# Altium PCB PCB1.PcbDoc (part 2 of 2)
Units mm, origin at the board's own origin, x right, y up, seen from the top; angles counter-clockwise.
Board outline 71.14 x 54.36 mm, 2 copper layers (Top Layer, Bottom Layer); 19 components, 50 nets, 188 pads, 100 vias.
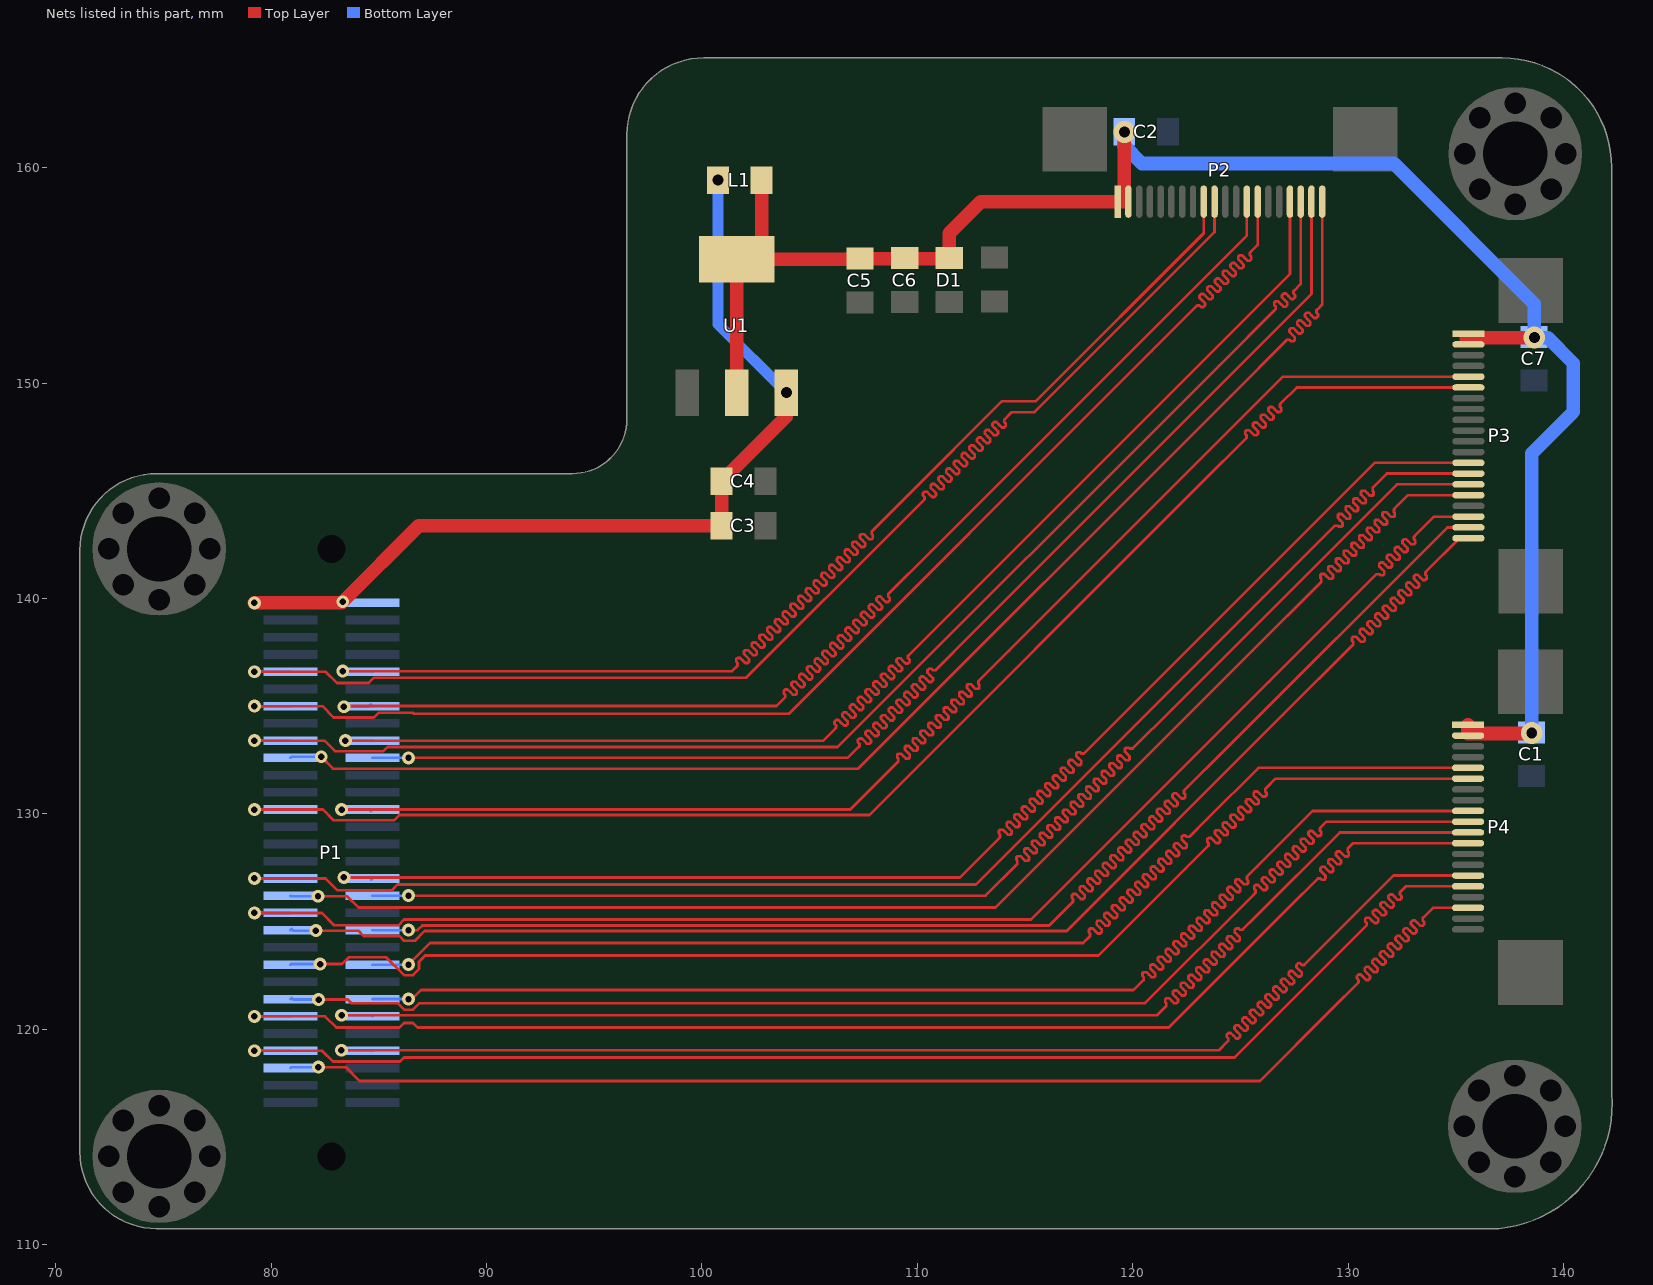
[diagram p2: the nets of this part, all layers, seen from the top]

## Via types
v1: diameter 0.6, hole 0.3, Top Layer to Bottom Layer, 56 vias
v2: diameter 1.016, hole 0.508, Top Layer to Bottom Layer, 44 vias

## Nets (pads, with @x,y where several pads share a name; then routed paths per layer and width w, separated by ;. In a path a pad name is that pad's centre, name@x,y a point inside that pad or via, vN(x,y) a via of type N, cw(c..) or ccw(c..) an arc to the next point about the centre after c; other vN are vias at no path point) (continued)
T20: P1.9 P2.9 | length 64.9
  Top Layer w0.127: v1(83.325,136.625) 101.395,136.625 101.625,136.855 101.652,136.882 101.652,137.008 101.598,137.062 101.598,137.187 101.652,137.241 101.778,137.241 101.895,137.125 102.012,137.008 102.137,137.008 102.191,137.062 102.191,137.187 102.074,137.304 101.958,137.421 101.958,137.547 102.012,137.601 102.137,137.601 102.254,137.484 102.371,137.367 102.496,137.367 102.55,137.421 102.55,137.547 102.434,137.663 102.317,137.78 102.317,137.906 102.371,137.96 102.496,137.96 102.613,137.843 102.73,137.726 102.856,137.726 102.91,137.78 102.91,137.906 102.793,138.023 102.676,138.139 102.676,138.265 102.73,138.319 102.856,138.319 102.972,138.202 103.089,138.085 103.215,138.085 103.269,138.139 103.269,138.265 103.152,138.382 103.035,138.499 103.035,138.624 103.089,138.678 103.215,138.678 103.332,138.561 103.448,138.445 103.574,138.445 103.628,138.499 103.628,138.624 103.511,138.741 103.395,138.858 103.395,138.984 103.448,139.037 103.574,139.037 103.691,138.921 103.808,138.804 103.933,138.804 103.987,138.858 103.987,138.984 103.87,139.1 103.754,139.217 103.754,139.343 103.808,139.397 103.933,139.397 104.05,139.28 104.167,139.163 104.293,139.163 104.346,139.217 104.346,139.343 104.23,139.459 104.113,139.576 104.113,139.702 104.167,139.756 104.293,139.756 104.409,139.639 104.526,139.522 104.652,139.522 104.706,139.576 104.706,139.702 104.589,139.819 104.472,139.935 104.472,140.061 104.526,140.115 104.652,140.115 104.768,139.998 104.885,139.882 105.011,139.882 105.065,139.935 105.065,140.061 104.948,140.178 104.831,140.295 104.831,140.42 104.885,140.474 105.011,140.474 105.128,140.357 105.244,140.241 105.37,140.241 105.424,140.295 105.424,140.42 105.307,140.537 105.191,140.654 105.191,140.78 105.244,140.833 105.37,140.833 105.487,140.717 105.604,140.6 105.729,140.6 105.783,140.654 105.783,140.78 105.667,140.896 105.55,141.013 105.55,141.139 105.604,141.193 105.729,141.193 105.846,141.076 105.963,140.959 106.089,140.959 106.142,141.013 106.142,141.139 106.026,141.256 105.909,141.372 105.909,141.498 105.963,141.552 106.089,141.552 106.205,141.435 106.322,141.318 106.448,141.318 106.502,141.372 106.502,141.498 106.385,141.615 106.268,141.731 106.268,141.857 106.322,141.911 106.448,141.911 106.565,141.794 106.681,141.678 106.807,141.678 106.861,141.731 106.861,141.857 106.744,141.974 106.627,142.091 106.627,142.216 106.681,142.27 106.807,142.27 106.924,142.154 107.04,142.037 107.166,142.037 107.22,142.091 107.22,142.216 107.103,142.333 106.987,142.45 106.987,142.576 107.04,142.63 107.166,142.63 107.283,142.513 107.4,142.396 107.525,142.396 107.579,142.45 107.579,142.576 107.463,142.692 107.346,142.809 107.346,142.935 107.4,142.989 107.525,142.989 107.642,142.872 107.759,142.755 107.885,142.755 107.939,142.809 107.939,142.935 107.885,142.989 107.885,143.114 109.487,144.716 113.933,149.162 115.507,149.162 123.303,156.958 P2.9@123.303,158.427
  Bottom Layer w0.127: v1(83.325,136.625) 84.675,136.625 P1.9@84.7,136.6
U12: P1.56 P4.18 | length 64.9
  Top Layer w0.127: v1(82.194,118.237) 83.461,118.237 84.1,117.598 125.904,117.598 129.235,120.929 130.485,122.179 130.485,122.287 130.413,122.359 130.413,122.467 130.485,122.538 130.593,122.538 130.719,122.413 130.844,122.287 130.952,122.287 131.024,122.359 131.024,122.467 130.898,122.592 130.772,122.718 130.772,122.826 130.844,122.898 130.952,122.898 131.078,122.772 131.203,122.646 131.311,122.646 131.383,122.718 131.383,122.826 131.257,122.952 131.132,123.077 131.132,123.185 131.203,123.257 131.311,123.257 131.437,123.131 131.563,123.005 131.67,123.005 131.742,123.077 131.742,123.185 131.617,123.311 131.491,123.436 131.491,123.544 131.563,123.616 131.67,123.616 131.796,123.49 131.922,123.365 132.03,123.365 132.101,123.436 132.101,123.544 131.976,123.67 131.85,123.796 131.85,123.903 131.922,123.975 132.03,123.975 132.155,123.85 132.281,123.724 132.389,123.724 132.461,123.796 132.461,123.903 132.335,124.029 132.209,124.155 132.209,124.263 132.281,124.334 132.389,124.334 132.515,124.209 132.64,124.083 132.748,124.083 132.82,124.155 132.82,124.263 132.694,124.388 132.568,124.514 132.568,124.622 132.64,124.694 132.748,124.694 132.874,124.568 133,124.442 133.107,124.442 133.179,124.514 133.179,124.622 133.053,124.748 132.928,124.873 132.928,124.981 133,125.053 133.107,125.053 133.233,124.927 133.359,124.801 133.466,124.801 133.538,124.873 133.538,124.981 133.466,125.053 133.466,125.161 133.502,125.197 133.942,125.636 P4.18@135.575,125.636
  Bottom Layer w0.127: P1.56@80.9,118.2 80.937,118.237 v1(82.194,118.237)
U14: P1.43 P4.5 | length 64.7
  Top Layer w0.127: v1(86.377,123) 87.38,124.003 117.704,124.003 117.996,124.295 118.023,124.322 118.023,124.448 117.969,124.501 117.969,124.627 118.023,124.681 118.148,124.681 118.265,124.564 118.382,124.448 118.508,124.448 118.561,124.501 118.561,124.627 118.445,124.744 118.328,124.861 118.328,124.986 118.382,125.04 118.508,125.04 118.624,124.924 118.741,124.807 118.867,124.807 118.921,124.861 118.921,124.986 118.804,125.103 118.687,125.22 118.687,125.346 118.741,125.399 118.867,125.399 118.984,125.283 119.1,125.166 119.226,125.166 119.28,125.22 119.28,125.346 119.163,125.462 119.046,125.579 119.046,125.705 119.1,125.759 119.226,125.759 119.343,125.642 119.459,125.525 119.585,125.525 119.639,125.579 119.639,125.705 119.522,125.822 119.406,125.938 119.406,126.064 119.459,126.118 119.585,126.118 119.702,126.001 119.819,125.884 119.944,125.884 119.998,125.938 119.998,126.064 119.882,126.181 119.765,126.297 119.765,126.423 119.819,126.477 119.944,126.477 120.061,126.36 120.178,126.244 120.304,126.244 120.358,126.297 120.358,126.423 120.241,126.54 120.124,126.657 120.124,126.782 120.178,126.836 120.304,126.836 120.42,126.72 120.537,126.603 120.663,126.603 120.717,126.657 120.717,126.782 120.6,126.899 120.483,127.016 120.483,127.142 120.537,127.196 120.663,127.196 120.78,127.079 120.896,126.962 121.022,126.962 121.076,127.016 121.076,127.142 120.959,127.258 120.842,127.375 120.842,127.501 120.896,127.555 121.022,127.555 121.139,127.438 121.256,127.321 121.381,127.321 121.435,127.375 121.435,127.501 121.318,127.618 121.202,127.734 121.202,127.86 121.256,127.914 121.381,127.914 121.498,127.797 121.615,127.68 121.74,127.68 121.794,127.734 121.794,127.86 121.678,127.977 121.561,128.094 121.561,128.219 121.615,128.273 121.74,128.273 121.857,128.156 121.974,128.04 122.1,128.04 122.154,128.094 122.154,128.219 122.037,128.336 121.92,128.453 121.92,128.578 121.974,128.632 122.1,128.632 122.216,128.516 122.333,128.399 122.459,128.399 122.513,128.453 122.513,128.578 122.396,128.695 122.279,128.812 122.279,128.938 122.333,128.992 122.459,128.992 122.513,128.938 122.638,128.938 123.457,129.756 125.837,132.136 P4.5@135.575,132.136
  Bottom Layer w0.127: P1.43@84.7,123 v1(86.377,123)
U15: P1.44 P4.6 | length 64.7
  Top Layer w0.127: v1(82.275,123.025) 83.294,123.025 83.611,123.342 85.341,123.342 86.174,122.509 86.58,122.509 86.867,122.797 86.867,123.131 87.155,123.419 118.415,123.419 122.453,127.457 123.52,128.524 123.52,128.65 123.466,128.703 123.466,128.829 123.52,128.883 123.646,128.883 123.763,128.766 123.879,128.65 124.005,128.65 124.059,128.703 124.059,128.829 123.942,128.946 123.825,129.063 123.825,129.188 123.879,129.242 124.005,129.242 124.122,129.126 124.238,129.009 124.364,129.009 124.418,129.063 124.418,129.188 124.301,129.305 124.185,129.422 124.185,129.548 124.238,129.601 124.364,129.601 124.481,129.485 124.598,129.368 124.723,129.368 124.777,129.422 124.777,129.548 124.661,129.664 124.544,129.781 124.544,129.907 124.598,129.961 124.723,129.961 124.84,129.844 124.957,129.727 125.083,129.727 125.137,129.781 125.137,129.907 125.02,130.024 124.903,130.14 124.903,130.266 124.957,130.32 125.083,130.32 125.199,130.203 125.316,130.086 125.442,130.086 125.496,130.14 125.496,130.266 125.379,130.383 125.262,130.5 125.262,130.625 125.316,130.679 125.442,130.679 125.559,130.562 125.675,130.446 125.801,130.446 125.855,130.5 125.855,130.625 125.738,130.742 125.621,130.859 125.621,130.984 125.675,131.038 125.801,131.038 125.918,130.922 126.035,130.805 126.16,130.805 126.214,130.859 126.214,130.984 126.16,131.038 126.16,131.164 126.187,131.191 126.632,131.636 P4.6@135.575,131.636
  Bottom Layer w0.127: P1.44@80.9,123 80.925,123.025 v1(82.275,123.025)
U17: P1.38 P3.18 | length 69.7
  Top Layer w0.127: v1(79.223,125.4) 82.354,125.4 82.929,124.825 85.908,124.825 86.174,125.09 115.286,125.09 126.34,136.144 131.327,141.131 131.453,141.131 131.506,141.077 131.632,141.077 131.686,141.131 131.686,141.257 131.569,141.374 131.453,141.49 131.453,141.616 131.506,141.67 131.632,141.67 131.749,141.553 131.866,141.437 131.991,141.437 132.045,141.49 132.045,141.616 131.929,141.733 131.812,141.85 131.812,141.975 131.866,142.029 131.991,142.029 132.108,141.913 132.225,141.796 132.351,141.796 132.405,141.85 132.405,141.975 132.288,142.092 132.171,142.209 132.171,142.335 132.225,142.389 132.351,142.389 132.467,142.272 132.584,142.155 132.71,142.155 132.764,142.209 132.764,142.335 132.647,142.451 132.53,142.568 132.53,142.694 132.584,142.748 132.71,142.748 132.827,142.631 132.943,142.514 133.069,142.514 133.123,142.568 133.123,142.694 133.069,142.748 133.069,142.873 133.096,142.9 133.994,143.799 P3.18@135.592,143.799
  Bottom Layer w0.127: v1(79.223,125.4) P1.38@80.9,125.4
U18: P1.33 P3.13 | length 70
  Top Layer w0.127: v1(83.375,127.05) 111.988,127.05 113.817,128.88 113.844,128.907 113.844,129.032 113.79,129.086 113.79,129.212 113.844,129.266 113.97,129.266 114.087,129.149 114.204,129.032 114.329,129.032 114.383,129.086 114.383,129.212 114.266,129.329 114.15,129.445 114.15,129.571 114.204,129.625 114.329,129.625 114.446,129.508 114.563,129.391 114.688,129.391 114.742,129.445 114.742,129.571 114.626,129.688 114.509,129.805 114.509,129.93 114.563,129.984 114.688,129.984 114.805,129.867 114.922,129.751 115.048,129.751 115.102,129.805 115.102,129.93 114.985,130.047 114.868,130.164 114.868,130.29 114.922,130.343 115.048,130.343 115.164,130.227 115.281,130.11 115.407,130.11 115.461,130.164 115.461,130.29 115.344,130.406 115.227,130.523 115.227,130.649 115.281,130.703 115.407,130.703 115.524,130.586 115.64,130.469 115.766,130.469 115.82,130.523 115.82,130.649 115.703,130.765 115.587,130.882 115.587,131.008 115.64,131.062 115.766,131.062 115.883,130.945 116,130.828 116.125,130.828 116.179,130.882 116.179,131.008 116.062,131.125 115.946,131.241 115.946,131.367 116,131.421 116.125,131.421 116.242,131.304 116.359,131.188 116.485,131.188 116.538,131.241 116.538,131.367 116.422,131.484 116.305,131.601 116.305,131.726 116.359,131.78 116.485,131.78 116.601,131.663 116.718,131.547 116.844,131.547 116.898,131.601 116.898,131.726 116.781,131.843 116.664,131.96 116.664,132.086 116.718,132.139 116.844,132.139 116.96,132.023 117.077,131.906 117.203,131.906 117.257,131.96 117.257,132.086 117.14,132.202 117.023,132.319 117.023,132.445 117.077,132.499 117.203,132.499 117.32,132.382 117.436,132.265 117.562,132.265 117.616,132.319 117.616,132.445 117.499,132.562 117.383,132.678 117.383,132.804 117.436,132.858 117.562,132.858 117.616,132.804 117.742,132.804 119.507,134.569 131.237,146.299 P3.13@135.592,146.299
  Bottom Layer w0.127: v1(83.375,127.05) 84.55,127.05 84.65,126.95 P1.33@84.7,127
U19: P1.34 P3.14 | length 69.7
  Top Layer w0.127: v1(79.223,127) 82.529,127 83.079,126.45 85.6,126.45 85.875,126.725 112.73,126.725 126.022,140.017 129.388,143.383 129.531,143.383 129.567,143.347 129.711,143.347 129.747,143.383 129.747,143.527 129.639,143.634 129.531,143.742 129.531,143.886 129.567,143.922 129.711,143.922 129.819,143.814 129.926,143.706 130.07,143.706 130.106,143.742 130.106,143.886 129.998,143.994 129.89,144.101 129.89,144.245 129.926,144.281 130.07,144.281 130.178,144.173 130.286,144.065 130.429,144.065 130.465,144.101 130.465,144.245 130.357,144.353 130.25,144.461 130.25,144.604 130.286,144.64 130.429,144.64 130.537,144.532 130.645,144.425 130.788,144.425 130.824,144.461 130.824,144.604 130.717,144.712 130.609,144.82 130.609,144.963 130.645,144.999 130.788,144.999 130.896,144.892 131.004,144.784 131.148,144.784 131.184,144.82 131.184,144.963 131.148,144.999 131.148,145.143 131.166,145.161 131.803,145.799 P3.14@135.592,145.799
  Bottom Layer w0.127: v1(79.223,127) P1.34@80.9,127
U20: P1.10 P2.10 | length 64.8
  Top Layer w0.127: v1(79.223,136.6) 82.529,136.6 83.054,136.075 84.525,136.075 84.775,136.325 102.06,136.325 109.436,143.701 110.336,144.6 110.336,144.708 110.264,144.78 110.264,144.888 110.336,144.959 110.443,144.959 110.569,144.834 110.695,144.708 110.803,144.708 110.874,144.78 110.874,144.888 110.749,145.013 110.623,145.139 110.623,145.247 110.695,145.319 110.803,145.319 110.928,145.193 111.054,145.067 111.162,145.067 111.234,145.139 111.234,145.247 111.108,145.373 110.982,145.498 110.982,145.606 111.054,145.678 111.162,145.678 111.288,145.552 111.413,145.426 111.521,145.426 111.593,145.498 111.593,145.606 111.467,145.732 111.341,145.857 111.341,145.965 111.413,146.037 111.521,146.037 111.647,145.911 111.772,145.786 111.88,145.786 111.952,145.857 111.952,145.965 111.826,146.091 111.701,146.217 111.701,146.324 111.772,146.396 111.88,146.396 112.006,146.271 112.132,146.145 112.239,146.145 112.311,146.217 112.311,146.324 112.186,146.45 112.06,146.576 112.06,146.684 112.132,146.755 112.239,146.755 112.365,146.63 112.491,146.504 112.599,146.504 112.67,146.576 112.67,146.684 112.545,146.809 112.419,146.935 112.419,147.043 112.491,147.115 112.599,147.115 112.724,146.989 112.85,146.863 112.958,146.863 113.03,146.935 113.03,147.043 112.904,147.169 112.778,147.294 112.778,147.402 112.85,147.474 112.958,147.474 113.084,147.348 113.209,147.222 113.317,147.222 113.389,147.294 113.389,147.402 113.263,147.528 113.137,147.653 113.137,147.761 113.209,147.833 113.317,147.833 113.443,147.707 113.569,147.582 113.676,147.582 113.748,147.653 113.748,147.761 113.622,147.887 113.497,148.013 113.497,148.12 113.569,148.192 113.676,148.192 113.802,148.067 113.928,147.941 114.035,147.941 114.107,148.013 114.107,148.12 114.035,148.192 114.035,148.3 114.071,148.336 114.385,148.65 115.445,148.65 123.803,157.008 P2.10@123.803,158.427
  Bottom Layer w0.127: v1(79.223,136.6) P1.10@80.9,136.6
V12: P1.53 P4.15 | length 65
  Top Layer w0.127: v1(83.261,119.024) 124.003,119.024 124.409,119.431 124.445,119.467 124.445,119.574 124.373,119.646 124.373,119.754 124.445,119.826 124.553,119.826 124.679,119.7 124.804,119.574 124.912,119.574 124.984,119.646 124.984,119.754 124.858,119.88 124.732,120.006 124.732,120.113 124.804,120.185 124.912,120.185 125.038,120.059 125.164,119.934 125.271,119.934 125.343,120.006 125.343,120.113 125.217,120.239 125.092,120.365 125.092,120.473 125.164,120.544 125.271,120.544 125.397,120.419 125.523,120.293 125.631,120.293 125.702,120.365 125.702,120.473 125.577,120.598 125.451,120.724 125.451,120.832 125.523,120.904 125.631,120.904 125.756,120.778 125.882,120.652 125.99,120.652 126.062,120.724 126.062,120.832 125.936,120.957 125.81,121.083 125.81,121.191 125.882,121.263 125.99,121.263 126.115,121.137 126.241,121.011 126.349,121.011 126.421,121.083 126.421,121.191 126.295,121.317 126.169,121.442 126.169,121.55 126.241,121.622 126.349,121.622 126.475,121.496 126.6,121.371 126.708,121.371 126.78,121.442 126.78,121.55 126.654,121.676 126.529,121.802 126.529,121.909 126.6,121.981 126.708,121.981 126.834,121.855 126.96,121.73 127.067,121.73 127.139,121.802 127.139,121.909 127.013,122.035 126.888,122.161 126.888,122.269 126.96,122.34 127.067,122.34 127.193,122.215 127.319,122.089 127.427,122.089 127.498,122.161 127.498,122.269 127.373,122.394 127.247,122.52 127.247,122.628 127.319,122.7 127.427,122.7 127.552,122.574 127.678,122.448 127.786,122.448 127.858,122.52 127.858,122.628 127.732,122.753 127.606,122.879 127.606,122.987 127.678,123.059 127.786,123.059 127.858,122.987 127.965,122.987 128.841,123.863 132.115,127.136 P4.15@135.575,127.136
  Bottom Layer w0.127: v1(83.261,119.024) 84.676,119.024 P1.53@84.7,119
V15: P1.35 P3.15 | length 70
  Top Layer w0.127: v1(86.377,126.2) 113.17,126.2 114.63,127.66 114.648,127.678 114.648,127.822 114.612,127.858 114.612,128.002 114.648,128.038 114.792,128.038 114.9,127.93 115.007,127.822 115.151,127.822 115.187,127.858 115.187,128.002 115.079,128.109 114.971,128.217 114.971,128.361 115.007,128.397 115.151,128.397 115.259,128.289 115.367,128.181 115.51,128.181 115.546,128.217 115.546,128.361 115.438,128.469 115.331,128.576 115.331,128.72 115.367,128.756 115.51,128.756 115.618,128.648 115.726,128.54 115.869,128.54 115.905,128.576 115.905,128.72 115.798,128.828 115.69,128.936 115.69,129.079 115.726,129.115 115.869,129.115 115.977,129.007 116.085,128.9 116.229,128.9 116.265,128.936 116.265,129.079 116.157,129.187 116.049,129.295 116.049,129.438 116.085,129.474 116.229,129.474 116.336,129.367 116.444,129.259 116.588,129.259 116.624,129.295 116.624,129.438 116.516,129.546 116.408,129.654 116.408,129.798 116.444,129.834 116.588,129.834 116.696,129.726 116.803,129.618 116.947,129.618 116.983,129.654 116.983,129.798 116.875,129.905 116.768,130.013 116.768,130.157 116.803,130.193 116.947,130.193 117.055,130.085 117.163,129.977 117.306,129.977 117.342,130.013 117.342,130.157 117.234,130.265 117.127,130.372 117.127,130.516 117.163,130.552 117.306,130.552 117.414,130.444 117.522,130.337 117.666,130.337 117.701,130.372 117.701,130.516 117.594,130.624 117.486,130.732 117.486,130.875 117.522,130.911 117.666,130.911 117.773,130.803 117.881,130.696 118.025,130.696 118.061,130.732 118.061,130.875 117.953,130.983 117.845,131.091 117.845,131.235 117.881,131.27 118.025,131.27 118.132,131.163 118.24,131.055 118.384,131.055 118.42,131.091 118.42,131.235 118.312,131.342 118.204,131.45 118.204,131.594 118.24,131.63 118.384,131.63 118.492,131.522 118.599,131.414 118.743,131.414 118.779,131.45 118.779,131.594 118.671,131.702 118.564,131.809 118.564,131.953 118.599,131.989 118.743,131.989 118.851,131.881 118.959,131.773 119.102,131.773 119.138,131.809 119.138,131.953 119.031,132.061 118.923,132.168 118.923,132.312 118.959,132.348 119.102,132.348 119.21,132.24 119.318,132.133 119.462,132.133 119.497,132.168 119.497,132.312 119.39,132.42 119.282,132.528 119.282,132.671 119.318,132.707 119.462,132.707 119.569,132.6 119.677,132.492 119.821,132.492 119.857,132.528 119.857,132.671 119.749,132.779 119.641,132.887 119.641,133.031 119.677,133.067 119.821,133.067 119.857,133.031 120,133.031 121.844,134.874 132.269,145.299 P3.15@135.592,145.299
  Bottom Layer w0.127: P1.35@84.7,126.2 v1(86.377,126.2)
V16: P1.39 P3.19 | length 69.8
  Top Layer w0.127: v1(86.377,124.6) 86.802,124.6 87.018,124.816 116.129,124.816 117.208,125.895 117.235,125.922 117.235,126.048 117.181,126.102 117.181,126.227 117.235,126.281 117.361,126.281 117.478,126.165 117.594,126.048 117.72,126.048 117.774,126.102 117.774,126.227 117.657,126.344 117.541,126.461 117.541,126.587 117.594,126.64 117.72,126.64 117.837,126.524 117.954,126.407 118.079,126.407 118.133,126.461 118.133,126.587 118.017,126.703 117.9,126.82 117.9,126.946 117.954,127 118.079,127 118.196,126.883 118.313,126.766 118.439,126.766 118.492,126.82 118.492,126.946 118.376,127.063 118.259,127.179 118.259,127.305 118.313,127.359 118.439,127.359 118.555,127.242 118.672,127.125 118.798,127.125 118.852,127.179 118.852,127.305 118.735,127.422 118.618,127.538 118.618,127.664 118.672,127.718 118.798,127.718 118.915,127.601 119.031,127.485 119.157,127.485 119.211,127.538 119.211,127.664 119.094,127.781 118.977,127.898 118.977,128.023 119.031,128.077 119.157,128.077 119.274,127.961 119.391,127.844 119.516,127.844 119.57,127.898 119.57,128.023 119.453,128.14 119.337,128.257 119.337,128.383 119.391,128.437 119.516,128.437 119.633,128.32 119.75,128.203 119.875,128.203 119.929,128.257 119.929,128.383 119.813,128.499 119.696,128.616 119.696,128.742 119.75,128.796 119.875,128.796 119.992,128.679 120.109,128.562 120.235,128.562 120.289,128.616 120.289,128.742 120.172,128.859 120.055,128.975 120.055,129.101 120.109,129.155 120.235,129.155 120.351,129.038 120.468,128.921 120.594,128.921 120.648,128.975 120.648,129.101 120.531,129.218 120.414,129.335 120.414,129.46 120.468,129.514 120.594,129.514 120.711,129.397 120.827,129.281 120.953,129.281 121.007,129.335 121.007,129.46 120.89,129.577 120.773,129.694 120.773,129.819 120.827,129.873 120.953,129.873 121.07,129.757 121.187,129.64 121.312,129.64 121.366,129.694 121.366,129.819 121.249,129.936 121.133,130.053 121.133,130.179 121.187,130.233 121.312,130.233 121.429,130.116 121.546,129.999 121.671,129.999 121.725,130.053 121.725,130.179 121.609,130.295 121.492,130.412 121.492,130.538 121.546,130.592 121.671,130.592 121.788,130.475 121.905,130.358 122.031,130.358 122.085,130.412 122.085,130.538 121.968,130.655 121.851,130.771 121.851,130.897 121.905,130.951 122.031,130.951 122.147,130.834 122.264,130.717 122.39,130.717 122.444,130.771 122.444,130.897 122.39,130.951 122.39,131.077 124.371,133.058 134.612,143.299 P3.19@135.592,143.299
  Bottom Layer w0.127: P1.39@84.7,124.6 v1(86.377,124.6)
V17: P1.25 P3.5 | length 69.8
  Top Layer w0.127: v1(83.275,130.2) 83.279,130.204 106.887,130.204 109.093,132.41 109.111,132.428 109.111,132.572 109.075,132.608 109.075,132.751 109.111,132.787 109.255,132.787 109.362,132.68 109.47,132.572 109.614,132.572 109.65,132.608 109.65,132.751 109.542,132.859 109.434,132.967 109.434,133.111 109.47,133.147 109.614,133.147 109.722,133.039 109.829,132.931 109.973,132.931 110.009,132.967 110.009,133.111 109.901,133.218 109.793,133.326 109.793,133.47 109.829,133.506 109.973,133.506 110.081,133.398 110.189,133.29 110.332,133.29 110.368,133.326 110.368,133.47 110.26,133.578 110.153,133.685 110.153,133.829 110.189,133.865 110.332,133.865 110.44,133.757 110.548,133.649 110.691,133.649 110.727,133.685 110.727,133.829 110.62,133.937 110.512,134.045 110.512,134.188 110.548,134.224 110.691,134.224 110.799,134.116 110.907,134.009 111.051,134.009 111.087,134.045 111.087,134.188 110.979,134.296 110.871,134.404 110.871,134.548 110.907,134.583 111.051,134.583 111.158,134.476 111.266,134.368 111.41,134.368 111.446,134.404 111.446,134.548 111.338,134.655 111.23,134.763 111.23,134.907 111.266,134.943 111.41,134.943 111.518,134.835 111.625,134.727 111.769,134.727 111.805,134.763 111.805,134.907 111.697,135.014 111.59,135.122 111.59,135.266 111.625,135.302 111.769,135.302 111.877,135.194 111.985,135.086 112.128,135.086 112.164,135.122 112.164,135.266 112.056,135.374 111.949,135.481 111.949,135.625 111.985,135.661 112.128,135.661 112.236,135.553 112.344,135.446 112.488,135.446 112.523,135.481 112.523,135.625 112.416,135.733 112.308,135.841 112.308,135.984 112.344,136.02 112.488,136.02 112.595,135.912 112.703,135.805 112.847,135.805 112.883,135.841 112.883,135.984 112.847,136.02 112.847,136.164 114.262,137.579 126.982,150.299 P3.5@135.592,150.299
  Bottom Layer w0.127: v1(83.275,130.2) 84.55,130.2 84.625,130.125 P1.25@84.7,130.2
V18: P1.26 P3.6 | length 69.7
  Top Layer w0.127: v1(79.223,130.2) 82.404,130.2 82.904,129.7 85.7,129.7 85.95,129.95 107.776,129.95 123.152,145.326 125.283,147.458 125.283,147.583 125.23,147.637 125.23,147.763 125.283,147.817 125.409,147.817 125.526,147.7 125.643,147.583 125.768,147.583 125.822,147.637 125.822,147.763 125.706,147.88 125.589,147.997 125.589,148.122 125.643,148.176 125.768,148.176 125.885,148.059 126.002,147.943 126.128,147.943 126.182,147.997 126.182,148.122 126.065,148.239 125.948,148.356 125.948,148.481 126.002,148.535 126.128,148.535 126.244,148.419 126.361,148.302 126.487,148.302 126.541,148.356 126.541,148.481 126.424,148.598 126.307,148.715 126.307,148.841 126.361,148.895 126.487,148.895 126.604,148.778 126.72,148.661 126.846,148.661 126.9,148.715 126.9,148.841 126.846,148.895 126.846,149.02 126.873,149.047 127.625,149.799 P3.6@135.592,149.799
  Bottom Layer w0.127: v1(79.223,130.2) P1.26@80.9,130.2
V20: P1.13 P2.13 | length 64.8
  Top Layer w0.127: v1(83.375,134.975) 83.404,135.004 103.457,135.004 103.835,135.382 103.871,135.418 103.871,135.526 103.799,135.598 103.799,135.705 103.871,135.777 103.979,135.777 104.105,135.651 104.23,135.526 104.338,135.526 104.41,135.598 104.41,135.705 104.284,135.831 104.158,135.957 104.158,136.065 104.23,136.136 104.338,136.136 104.464,136.011 104.59,135.885 104.697,135.885 104.769,135.957 104.769,136.065 104.643,136.19 104.518,136.316 104.518,136.424 104.59,136.496 104.697,136.496 104.823,136.37 104.949,136.244 105.057,136.244 105.128,136.316 105.128,136.424 105.003,136.549 104.877,136.675 104.877,136.783 104.949,136.855 105.057,136.855 105.182,136.729 105.308,136.603 105.416,136.603 105.488,136.675 105.488,136.783 105.362,136.909 105.236,137.034 105.236,137.142 105.308,137.214 105.416,137.214 105.541,137.088 105.667,136.963 105.775,136.963 105.847,137.034 105.847,137.142 105.721,137.268 105.595,137.394 105.595,137.501 105.667,137.573 105.775,137.573 105.901,137.447 106.026,137.322 106.134,137.322 106.206,137.394 106.206,137.501 106.08,137.627 105.955,137.753 105.955,137.861 106.026,137.932 106.134,137.932 106.26,137.807 106.386,137.681 106.493,137.681 106.565,137.753 106.565,137.861 106.439,137.986 106.314,138.112 106.314,138.22 106.386,138.292 106.493,138.292 106.619,138.166 106.745,138.04 106.853,138.04 106.924,138.112 106.924,138.22 106.799,138.345 106.673,138.471 106.673,138.579 106.745,138.651 106.853,138.651 106.978,138.525 107.104,138.399 107.212,138.399 107.284,138.471 107.284,138.579 107.158,138.705 107.032,138.83 107.032,138.938 107.104,139.01 107.212,139.01 107.337,138.884 107.463,138.759 107.571,138.759 107.643,138.83 107.643,138.938 107.517,139.064 107.391,139.19 107.391,139.297 107.463,139.369 107.571,139.369 107.697,139.244 107.822,139.118 107.93,139.118 108.002,139.19 108.002,139.297 107.876,139.423 107.751,139.549 107.751,139.657 107.822,139.728 107.93,139.728 108.056,139.603 108.182,139.477 108.289,139.477 108.361,139.549 108.361,139.657 108.236,139.782 108.11,139.908 108.11,140.016 108.182,140.088 108.289,140.088 108.415,139.962 108.541,139.836 108.649,139.836 108.72,139.908 108.72,140.016 108.649,140.088 108.649,140.195 110.642,142.189 125.303,156.85 P2.13@125.303,158.427
  Bottom Layer w0.127: v1(83.375,134.975) 84.525,134.975 84.625,135.075 P1.13@84.7,135
VCC_3V3: C1.2 C2.2 C5.2 C6.2 C7.2 D1.1 L1.2 P2.1 P2.2 P3.1 P3.2 P4.1 P4.2 U1.2 U1.4 | length 84
  Top Layer w0.635: U1.2@101.62,149.558 U1.4@101.62,155.758 U1.4@102.825,155.758 ; L1.2@102.776,159.427 102.776,155.807 U1.4@102.825,155.758 ; v2(119.616,161.659) 119.616,158.427 P2.1@119.303,158.427 112.961,158.427 111.481,156.947 D1.1@111.481,155.804 111.455,155.778 C5.2@107.34,155.778 107.32,155.758 U1.4@102.825,155.758 ; 135.499,152.062 135.549,152.112 v2(138.649,152.112) ; P4.1@135.575,134.136 135.575,133.731 138.51,133.731 v2(138.531,133.752)
  Bottom Layer w0.635: v2(119.616,161.659) 119.616,161.003 120.421,160.198 132.131,160.198 138.649,153.679 v2(138.649,152.112) 139.277,152.112 140.462,150.927 140.462,148.666 138.531,146.735 v2(138.531,133.752)
VCC_5V: C3.2 C4.2 L1.1 P1.1 P1.2 U1.3 | length 43.5
  Top Layer w0.635: v1(79.223,139.8) 83.275,139.8 v1(83.325,139.85) 86.858,143.383 C3.2@100.914,143.383 C4.2@100.914,145.44 103.92,148.446 v2(103.92,149.558)
  Bottom Layer w0.127: v1(79.223,139.8) P1.2@80.9,139.8
  Bottom Layer w0.508: v2(100.744,159.427) 100.744,152.733 v2(103.92,149.558)
W13: P1.54 P4.16 | length 64.9
  Top Layer w0.127: v1(79.223,119) 82.366,119 82.866,118.5 85.983,118.5 86.174,118.69 124.736,118.69 129.273,123.228 130.868,124.823 130.868,124.93 130.796,125.002 130.796,125.11 130.868,125.182 130.976,125.182 131.101,125.056 131.227,124.93 131.335,124.93 131.407,125.002 131.407,125.11 131.281,125.236 131.155,125.361 131.155,125.469 131.227,125.541 131.335,125.541 131.46,125.415 131.586,125.29 131.694,125.29 131.766,125.361 131.766,125.469 131.64,125.595 131.514,125.721 131.514,125.828 131.586,125.9 131.694,125.9 131.82,125.774 131.945,125.649 132.053,125.649 132.125,125.721 132.125,125.828 131.999,125.954 131.874,126.08 131.874,126.188 131.945,126.259 132.053,126.259 132.179,126.134 132.305,126.008 132.412,126.008 132.484,126.08 132.484,126.188 132.412,126.259 132.412,126.367 132.448,126.403 132.681,126.636 P4.16@135.575,126.636
  Bottom Layer w0.127: v1(79.223,119) P1.54@80.9,119
W14: P1.49 P4.11 | length 64.8
  Top Layer w0.127: v1(83.275,120.65) 121.133,120.65 121.539,121.056 121.566,121.083 121.566,121.209 121.512,121.263 121.512,121.389 121.566,121.443 121.692,121.443 121.808,121.326 121.925,121.209 122.051,121.209 122.105,121.263 122.105,121.389 121.988,121.505 121.871,121.622 121.871,121.748 121.925,121.802 122.051,121.802 122.168,121.685 122.284,121.568 122.41,121.568 122.464,121.622 122.464,121.748 122.347,121.865 122.23,121.981 122.23,122.107 122.284,122.161 122.41,122.161 122.527,122.044 122.644,121.927 122.769,121.927 122.823,121.981 122.823,122.107 122.706,122.224 122.59,122.341 122.59,122.466 122.644,122.52 122.769,122.52 122.886,122.403 123.003,122.287 123.129,122.287 123.182,122.341 123.182,122.466 123.066,122.583 122.949,122.7 122.949,122.826 123.003,122.879 123.129,122.879 123.245,122.763 123.362,122.646 123.488,122.646 123.542,122.7 123.542,122.826 123.425,122.942 123.308,123.059 123.308,123.185 123.362,123.239 123.488,123.239 123.604,123.122 123.721,123.005 123.847,123.005 123.901,123.059 123.901,123.185 123.784,123.301 123.667,123.418 123.667,123.544 123.721,123.598 123.847,123.598 123.964,123.481 124.08,123.364 124.206,123.364 124.26,123.418 124.26,123.544 124.143,123.661 124.027,123.777 124.027,123.903 124.08,123.957 124.206,123.957 124.323,123.84 124.44,123.724 124.565,123.724 124.619,123.777 124.619,123.903 124.502,124.02 124.386,124.137 124.386,124.262 124.44,124.316 124.565,124.316 124.682,124.199 124.799,124.083 124.925,124.083 124.978,124.137 124.978,124.262 124.862,124.379 124.745,124.496 124.745,124.622 124.799,124.675 124.925,124.675 124.978,124.622 125.104,124.622 125.692,125.209 129.619,129.136 P4.11@135.575,129.136
  Bottom Layer w0.127: v1(83.275,120.65) 84.65,120.65 P1.49@84.7,120.6
W15: P1.36 P3.16 | length 69.7
  Top Layer w0.127: v1(82.175,126.175) 83.529,126.175 84.054,125.65 113.636,125.65 125.565,137.579 128.762,140.776 128.762,140.92 128.726,140.955 128.726,141.099 128.762,141.135 128.905,141.135 129.013,141.027 129.121,140.92 129.265,140.92 129.3,140.955 129.3,141.099 129.193,141.207 129.085,141.315 129.085,141.458 129.121,141.494 129.265,141.494 129.372,141.387 129.48,141.279 129.624,141.279 129.66,141.315 129.66,141.458 129.552,141.566 129.444,141.674 129.444,141.818 129.48,141.853 129.624,141.853 129.732,141.746 129.839,141.638 129.983,141.638 130.019,141.674 130.019,141.818 129.911,141.925 129.803,142.033 129.803,142.177 129.839,142.213 129.983,142.213 130.091,142.105 130.199,141.997 130.342,141.997 130.378,142.033 130.378,142.177 130.27,142.285 130.163,142.392 130.163,142.536 130.199,142.572 130.342,142.572 130.45,142.464 130.558,142.356 130.701,142.356 130.737,142.392 130.737,142.536 130.63,142.644 130.522,142.752 130.522,142.895 130.558,142.931 130.701,142.931 130.809,142.823 130.917,142.716 131.061,142.716 131.097,142.752 131.097,142.895 130.989,143.003 130.881,143.111 130.881,143.254 130.917,143.29 131.061,143.29 131.168,143.183 131.276,143.075 131.42,143.075 131.456,143.111 131.456,143.254 131.348,143.362 131.24,143.47 131.24,143.614 131.276,143.65 131.42,143.65 131.528,143.542 131.635,143.434 131.779,143.434 131.815,143.47 131.815,143.614 131.707,143.721 131.599,143.829 131.599,143.973 131.635,144.009 131.779,144.009 131.887,143.901 131.995,143.793 132.138,143.793 132.174,143.829 132.174,143.973 132.138,144.009 132.138,144.152 132.156,144.17 132.785,144.799 P3.16@135.592,144.799
  Bottom Layer w0.127: P1.36@80.9,126.2 80.925,126.175 v1(82.175,126.175)
W16: P1.40 P3.20 | length 69.8
  Top Layer w0.127: v1(82.075,124.575) 82.82,124.575 82.824,124.571 84.058,124.571 84.296,124.333 85.95,124.333 86.174,124.109 86.671,124.109 87.123,124.562 116.942,124.562 126.987,134.607 130.244,137.864 130.244,137.99 130.19,138.043 130.19,138.169 130.244,138.223 130.37,138.223 130.486,138.106 130.603,137.99 130.729,137.99 130.783,138.043 130.783,138.169 130.666,138.286 130.549,138.403 130.549,138.528 130.603,138.582 130.729,138.582 130.846,138.466 130.962,138.349 131.088,138.349 131.142,138.403 131.142,138.528 131.025,138.645 130.908,138.762 130.908,138.888 130.962,138.941 131.088,138.941 131.205,138.825 131.321,138.708 131.447,138.708 131.501,138.762 131.501,138.888 131.384,139.004 131.268,139.121 131.268,139.247 131.321,139.301 131.447,139.301 131.564,139.184 131.681,139.067 131.806,139.067 131.86,139.121 131.86,139.247 131.744,139.364 131.627,139.48 131.627,139.606 131.681,139.66 131.806,139.66 131.923,139.543 132.04,139.426 132.166,139.426 132.219,139.48 132.219,139.606 132.103,139.723 131.986,139.839 131.986,139.965 132.04,140.019 132.166,140.019 132.282,139.902 132.399,139.786 132.525,139.786 132.579,139.839 132.579,139.965 132.462,140.082 132.345,140.199 132.345,140.324 132.399,140.378 132.525,140.378 132.642,140.262 132.758,140.145 132.884,140.145 132.938,140.199 132.938,140.324 132.821,140.441 132.704,140.558 132.704,140.684 132.758,140.738 132.884,140.738 133.001,140.621 133.118,140.504 133.243,140.504 133.297,140.558 133.297,140.684 133.18,140.8 133.064,140.917 133.064,141.043 133.118,141.097 133.243,141.097 133.36,140.98 133.477,140.863 133.602,140.863 133.656,140.917 133.656,141.043 133.602,141.097 133.602,141.222 133.629,141.249 135.179,142.799 P3.20@135.592,142.799
  Bottom Layer w0.127: P1.40@80.9,124.6 80.95,124.65 81.025,124.575 v1(82.075,124.575)
W18: P1.17 P2.17 | length 64.9
  Top Layer w0.127: v1(83.45,133.4) 105.638,133.4 106.197,133.96 106.233,133.996 106.233,134.103 106.161,134.175 106.161,134.283 106.233,134.355 106.341,134.355 106.467,134.229 106.593,134.103 106.7,134.103 106.772,134.175 106.772,134.283 106.646,134.409 106.521,134.534 106.521,134.642 106.593,134.714 106.7,134.714 106.826,134.588 106.952,134.462 107.06,134.462 107.131,134.534 107.131,134.642 107.006,134.768 106.88,134.894 106.88,135.001 106.952,135.073 107.06,135.073 107.185,134.947 107.311,134.822 107.419,134.822 107.491,134.894 107.491,135.001 107.365,135.127 107.239,135.253 107.239,135.361 107.311,135.432 107.419,135.432 107.544,135.307 107.67,135.181 107.778,135.181 107.85,135.253 107.85,135.361 107.724,135.486 107.598,135.612 107.598,135.72 107.67,135.792 107.778,135.792 107.904,135.666 108.029,135.54 108.137,135.54 108.209,135.612 108.209,135.72 108.083,135.845 107.958,135.971 107.958,136.079 108.029,136.151 108.137,136.151 108.263,136.025 108.389,135.899 108.496,135.899 108.568,135.971 108.568,136.079 108.442,136.205 108.317,136.33 108.317,136.438 108.389,136.51 108.496,136.51 108.622,136.384 108.748,136.259 108.856,136.259 108.927,136.33 108.927,136.438 108.802,136.564 108.676,136.69 108.676,136.797 108.748,136.869 108.856,136.869 108.981,136.743 109.107,136.618 109.215,136.618 109.287,136.69 109.287,136.797 109.161,136.923 109.035,137.049 109.035,137.157 109.107,137.228 109.215,137.228 109.34,137.103 109.466,136.977 109.574,136.977 109.646,137.049 109.646,137.157 109.574,137.228 109.574,137.336 111.442,139.205 127.303,155.066 P2.17@127.303,158.427
  Bottom Layer w0.127: v1(83.45,133.4) P1.17@84.7,133.4
W19: P1.18 P2.18 | length 64.9
  Top Layer w0.127: v1(79.223,133.4) 82.469,133.4 82.96,132.91 85.21,132.91 85.4,133.1 106.3,133.1 124.001,150.801 126.644,153.444 126.644,153.552 126.573,153.624 126.573,153.732 126.644,153.804 126.752,153.804 126.878,153.678 127.004,153.552 127.111,153.552 127.183,153.624 127.183,153.732 127.057,153.857 126.932,153.983 126.932,154.091 127.004,154.163 127.111,154.163 127.237,154.037 127.363,153.911 127.471,153.911 127.542,153.983 127.542,154.091 127.471,154.163 127.471,154.271 127.506,154.306 127.803,154.603 P2.18@127.803,158.427
  Bottom Layer w0.127: v1(79.223,133.4) P1.18@80.9,133.4
W20: P1.14 P2.14 | length 65
  Top Layer w0.127: v1(79.223,135) 82.375,135 82.896,134.479 84.779,134.479 84.99,134.69 86.58,134.69 86.621,134.65 104.043,134.65 120.879,151.486 122.997,153.604 123.105,153.604 123.177,153.533 123.285,153.533 123.357,153.604 123.357,153.712 123.231,153.838 123.105,153.964 123.105,154.071 123.177,154.143 123.285,154.143 123.411,154.018 123.536,153.892 123.644,153.892 123.716,153.964 123.716,154.071 123.59,154.197 123.464,154.323 123.464,154.431 123.536,154.502 123.644,154.502 123.77,154.377 123.895,154.251 124.003,154.251 124.075,154.323 124.075,154.431 123.949,154.556 123.824,154.682 123.824,154.79 123.895,154.862 124.003,154.862 124.129,154.736 124.255,154.61 124.362,154.61 124.434,154.682 124.434,154.79 124.309,154.916 124.183,155.041 124.183,155.149 124.255,155.221 124.362,155.221 124.488,155.095 124.614,154.969 124.722,154.969 124.793,155.041 124.793,155.149 124.668,155.275 124.542,155.4 124.542,155.508 124.614,155.58 124.722,155.58 124.847,155.454 124.973,155.329 125.081,155.329 125.153,155.4 125.153,155.508 125.027,155.634 124.901,155.76 124.901,155.867 124.973,155.939 125.081,155.939 125.207,155.814 125.332,155.688 125.44,155.688 125.512,155.76 125.512,155.867 125.44,155.939 125.44,156.047 125.476,156.083 125.803,156.41 P2.14@125.803,158.427
  Bottom Layer w0.127: v1(79.223,135) P1.14@80.9,135
Y14: P1.50 P4.12 | length 64.7
  Top Layer w0.127: v1(79.223,120.6) 82.5,120.6 83.025,120.075 85.958,120.075 86.174,120.29 86.58,120.29 86.796,120.075 121.675,120.075 127.241,125.641 128.6,127 128.726,127 128.78,126.946 128.905,126.946 128.959,127 128.959,127.126 128.842,127.242 128.726,127.359 128.726,127.485 128.78,127.539 128.905,127.539 129.022,127.422 129.139,127.305 129.265,127.305 129.318,127.359 129.318,127.485 129.202,127.601 129.085,127.718 129.085,127.844 129.139,127.898 129.265,127.898 129.381,127.781 129.498,127.664 129.624,127.664 129.678,127.718 129.678,127.844 129.561,127.961 129.444,128.077 129.444,128.203 129.498,128.257 129.624,128.257 129.74,128.14 129.857,128.024 129.983,128.024 130.037,128.077 130.037,128.203 129.983,128.257 129.983,128.383 130.01,128.41 130.236,128.636 P4.12@135.575,128.636
  Bottom Layer w0.127: v1(79.223,120.6) P1.50@80.9,120.6
Y16: P1.47 P4.9 | length 64.9
  Top Layer w0.127: v1(86.377,121.4) 86.548,121.4 86.967,121.818 120.04,121.818 120.485,122.263 120.512,122.29 120.512,122.416 120.458,122.469 120.458,122.595 120.512,122.649 120.638,122.649 120.754,122.532 120.871,122.416 120.997,122.416 121.051,122.469 121.051,122.595 120.934,122.712 120.817,122.829 120.817,122.954 120.871,123.008 120.997,123.008 121.114,122.892 121.23,122.775 121.356,122.775 121.41,122.829 121.41,122.954 121.293,123.071 121.176,123.188 121.176,123.314 121.23,123.367 121.356,123.367 121.473,123.251 121.589,123.134 121.715,123.134 121.769,123.188 121.769,123.314 121.652,123.43 121.536,123.547 121.536,123.673 121.589,123.727 121.715,123.727 121.832,123.61 121.949,123.493 122.074,123.493 122.128,123.547 122.128,123.673 122.012,123.79 121.895,123.906 121.895,124.032 121.949,124.086 122.074,124.086 122.191,123.969 122.308,123.852 122.434,123.852 122.487,123.906 122.487,124.032 122.371,124.149 122.254,124.265 122.254,124.391 122.308,124.445 122.434,124.445 122.55,124.328 122.667,124.212 122.793,124.212 122.847,124.265 122.847,124.391 122.73,124.508 122.613,124.625 122.613,124.75 122.667,124.804 122.793,124.804 122.91,124.688 123.026,124.571 123.152,124.571 123.206,124.625 123.206,124.75 123.089,124.867 122.972,124.984 122.972,125.11 123.026,125.164 123.152,125.164 123.269,125.047 123.386,124.93 123.511,124.93 123.565,124.984 123.565,125.11 123.448,125.226 123.332,125.343 123.332,125.469 123.386,125.523 123.511,125.523 123.628,125.406 123.745,125.289 123.87,125.289 123.924,125.343 123.924,125.469 123.808,125.586 123.691,125.702 123.691,125.828 123.745,125.882 123.87,125.882 123.987,125.765 124.104,125.648 124.23,125.648 124.284,125.702 124.284,125.828 124.167,125.945 124.05,126.062 124.05,126.187 124.104,126.241 124.23,126.241 124.346,126.124 124.463,126.008 124.589,126.008 124.643,126.062 124.643,126.187 124.526,126.304 124.409,126.421 124.409,126.546 124.463,126.6 124.589,126.6 124.706,126.484 124.822,126.367 124.948,126.367 125.002,126.421 125.002,126.546 124.885,126.663 124.768,126.78 124.768,126.906 124.822,126.96 124.948,126.96 125.065,126.843 125.182,126.726 125.307,126.726 125.361,126.78 125.361,126.906 125.307,126.96 125.307,127.085 125.781,127.559 128.358,130.136 P4.9@135.575,130.136
  Bottom Layer w0.127: P1.47@84.7,121.4 v1(86.377,121.4)
Y17: P1.48 P4.10 | length 64.9
  Top Layer w0.127: v1(82.2,121.375) 83.554,121.375 83.72,121.209 85.875,121.209 86.174,120.909 86.58,120.909 86.879,121.209 120.574,121.209 125.603,126.238 125.701,126.336 125.701,126.462 125.647,126.515 125.647,126.641 125.701,126.695 125.827,126.695 125.943,126.578 126.06,126.462 126.186,126.462 126.24,126.515 126.24,126.641 126.123,126.758 126.006,126.875 126.006,127 126.06,127.054 126.186,127.054 126.303,126.938 126.419,126.821 126.545,126.821 126.599,126.875 126.599,127 126.482,127.117 126.365,127.234 126.365,127.36 126.419,127.413 126.545,127.413 126.662,127.297 126.778,127.18 126.904,127.18 126.958,127.234 126.958,127.36 126.841,127.476 126.725,127.593 126.725,127.719 126.778,127.773 126.904,127.773 127.021,127.656 127.138,127.539 127.263,127.539 127.317,127.593 127.317,127.719 127.201,127.836 127.084,127.952 127.084,128.078 127.138,128.132 127.263,128.132 127.38,128.015 127.497,127.898 127.623,127.898 127.677,127.952 127.677,128.078 127.56,128.195 127.443,128.312 127.443,128.437 127.497,128.491 127.623,128.491 127.739,128.374 127.856,128.258 127.982,128.258 128.036,128.312 128.036,128.437 127.919,128.554 127.802,128.671 127.802,128.796 127.856,128.85 127.982,128.85 128.099,128.734 128.215,128.617 128.341,128.617 128.395,128.671 128.395,128.796 128.278,128.913 128.161,129.03 128.161,129.156 128.215,129.21 128.341,129.21 128.458,129.093 128.575,128.976 128.7,128.976 128.754,129.03 128.754,129.156 128.7,129.21 128.7,129.335 128.727,129.362 129.001,129.636 P4.10@135.575,129.636
  Bottom Layer w0.127: P1.48@80.9,121.4 80.95,121.45 81.025,121.375 v1(82.2,121.375)
Y18: P1.19 P2.19 | length 64.7
  Top Layer w0.127: v1(86.377,132.6) 106.768,132.6 107.277,133.109 107.313,133.145 107.313,133.252 107.241,133.324 107.241,133.432 107.313,133.504 107.421,133.504 107.546,133.378 107.672,133.252 107.78,133.252 107.852,133.324 107.852,133.432 107.726,133.558 107.6,133.683 107.6,133.791 107.672,133.863 107.78,133.863 107.906,133.737 108.031,133.612 108.139,133.612 108.211,133.683 108.211,133.791 108.085,133.917 107.959,134.043 107.959,134.15 108.031,134.222 108.139,134.222 108.265,134.097 108.39,133.971 108.498,133.971 108.57,134.043 108.57,134.15 108.444,134.276 108.319,134.402 108.319,134.51 108.39,134.581 108.498,134.581 108.624,134.456 108.75,134.33 108.857,134.33 108.929,134.402 108.929,134.51 108.804,134.635 108.678,134.761 108.678,134.869 108.75,134.941 108.857,134.941 108.983,134.815 109.109,134.689 109.217,134.689 109.288,134.761 109.288,134.869 109.163,134.995 109.037,135.12 109.037,135.228 109.109,135.3 109.217,135.3 109.342,135.174 109.468,135.048 109.576,135.048 109.648,135.12 109.648,135.228 109.522,135.354 109.396,135.479 109.396,135.587 109.468,135.659 109.576,135.659 109.702,135.533 109.827,135.408 109.935,135.408 110.007,135.479 110.007,135.587 109.881,135.713 109.755,135.839 109.755,135.946 109.827,136.018 109.935,136.018 110.061,135.893 110.187,135.767 110.294,135.767 110.366,135.839 110.366,135.946 110.24,136.072 110.115,136.198 110.115,136.306 110.187,136.378 110.294,136.378 110.42,136.252 110.546,136.126 110.653,136.126 110.725,136.198 110.725,136.306 110.6,136.431 110.474,136.557 110.474,136.665 110.546,136.737 110.653,136.737 110.725,136.665 110.833,136.665 112.573,138.405 128.303,154.135 P2.19@128.303,158.427
  Bottom Layer w0.127: P1.19@84.7,132.6 v1(86.377,132.6)
Y19: P1.20 P2.20 | length 64.7
  Top Layer w0.127: v1(82.325,132.65) 82.875,132.1 107.259,132.1 124.562,149.403 127.174,152.015 127.282,152.015 127.353,151.943 127.461,151.943 127.533,152.015 127.533,152.123 127.407,152.249 127.282,152.374 127.282,152.482 127.353,152.554 127.461,152.554 127.587,152.428 127.713,152.302 127.82,152.302 127.892,152.374 127.892,152.482 127.767,152.608 127.641,152.733 127.641,152.841 127.713,152.913 127.82,152.913 127.946,152.787 128.072,152.662 128.18,152.662 128.252,152.733 128.252,152.841 128.126,152.967 128,153.093 128,153.2 128.072,153.272 128.18,153.272 128.305,153.147 128.431,153.021 128.539,153.021 128.611,153.093 128.611,153.2 128.539,153.272 128.539,153.38 128.575,153.416 128.803,153.645 P2.20@128.803,158.427
  Bottom Layer w0.127: P1.20@80.9,132.6 80.95,132.65 v1(82.325,132.65)
pads on no net: Designator1.1 Designator2.1 Designator3.1 Designator4.1 P1.21 P1.22 P1.61 P1.62 P2.3 P2.6 P2.21 P2.22 P3.21 P3.22 P4.21 P4.22

## Polygon pours and split planes (outlines as drawn)
DGND on Top Layer "Top Layer-No Net" (solid, remove dead copper, pour order 8): 66.573,150.546 66.573,105.918 149.835,105.918 153.06,102.692 151.714,104.038 151.714,170.612 99.009,170.612 96.774,168.377 92.558,164.16 92.558,148.666
DGND on Bottom Layer "Top Layer-No Net" (solid, remove dead copper, pour order 10): 71.78,147.676 91.313,147.676 91.948,148.311 94.894,151.257 94.894,167.564 142.672,167.564 144.272,165.964 144.374,165.862 144.374,108.687 70.79,108.687 69.723,107.62 67.564,109.779 67.564,146.609

## Keep-outs
Keep-Out Layer:
  lines w0.254: 75,110.744 136.744,110.744 ccw(c136.744,116.24) 142.24,116.24 142.24,160.02 ccw(c137.414,160.274) 137.668,165.1 100.076,165.1 ; 93.472,145.796 ccw(c93.726,148.59) 96.52,148.336 ; 93.98,110.744 74.676,110.744 cw(c74.676,114.3) 71.12,114.3 71.12,142.24 cw(c75.438,141.478) 76.2,145.796 93.98,145.796 ; 96.52,147.828 96.52,162.052 cw(c100.076,161.544) 100.584,165.1 ; 71.12,142.748 cw(c74.676,142.24) 75.184,145.796 ccw(c74.676,142.24) 71.12,142.748

## Silkscreen, mask and mechanical layers (free items; w line width, h text height)
Top Overlay:
  drawing of 2273 lines, arcs and shapes, not listed
  text "JLCJLCJLCJLC" at 119.431,163.373 h0.8 r180
  text "1" at 119.405,155.778 h1.02
  text "1" at 132.893,152.197 h1.02 r270
  text "1" at 133.071,133.96 h1.02 r270
  text "Designed by LiuYang" at 110.363,115.128 h1.02
  text "github.com/liuyang9609" at 110.261,112.207 h1.02
Bottom Overlay:
  text "2" at 78.156,140.157 h1.02 r90
  text "1" at 88.646,139.903 h1.02 r90
  text "59" at 89.052,117.754 h1.02 r90
  text "BTB Convert to FPC20" at 109.22,113.03 h1.02
Mechanical 1:
  lines w0.254: 71.12,114.3 ccw(c74.676,114.3) 74.676,110.744 93.98,110.744 137,110.744 ccw(c136.492,116.492) 142.24,117 142.24,160.02 ccw(c137.16,160.02) 137.16,165.1 101.6,165.1 100.076,165.1 ccw(c100.076,161.544) 96.52,161.544 96.52,148.336 cw(c93.98,148.336) 93.98,145.796 74.676,145.796 ccw(c74.676,142.24) 71.12,142.24 71.12,114.3